# EAGLE board GB202-CC-from-SF-Base (EAGLE 7.5.0)

Size 100 x 80 mm. Coordinates in mm from the lower left corner, seen from the top.
Outline: 0,0 100,0 100,80 0,80 0,0
Copper layers (1*16): Top 0.035mm / dielectric 1.5mm / Bottom 0.035mm
Design rules "SparkFun-2-layer-STANDARD": minimum track width 10mil, minimum drill 20mil, track to track 10mil, track to pad 8mil, pad to pad 8mil, via to via 10mil, smd to smd 8mil, copper to edge 8mil, drill to drill 8mil, minimum pad ring 10mil, minimum via ring 10mil, stop-mask expansion 4mil, vias tented up to drill 20mil, thermal gap 10mil

## Footprints (pad centres in the part's own frame; a part is rotated, then mirrored left to right if it is on the bottom)
0603-CAP = smd 1.1 x 1: 1 -0.85,0; 2 0.85,0
EIA3216 = smd 1.4 x 1.6: A 1.4,0; C -1.4,0
C0603 = smd 1.1 x 1: 1 -0.85,0; 2 0.85,0
CAP-PTH-SMALL = drill 0.7 pad 1.651: 1 0,0; 2 2.54,0
SMA-DIODE = smd 1.27 x 1.47: A -2.15,0; C 2.15,0
PTC-1206 = smd 1 x 1.8: 1 -1.4,0; 2 1.4,0
DIL16 = drill 0.813 pad 1.6: 1 -8.89,-3.81 | drill 0.813 pad 1.6 octagon: 2 -6.35,-3.81; 3 -3.81,-3.81; 4 -1.27,-3.81; 5 1.27,-3.81; 6 3.81,-3.81; 7 6.35,-3.81; 8 8.89,-3.81; 9 8.89,3.81; 10 6.35,3.81; 11 3.81,3.81; 12 1.27,3.81; 13 -1.27,3.81; 14 -3.81,3.81; 15 -6.35,3.81; 16 -8.89,3.81
1X01 = drill 1.016 pad 1.88: 1 0,0
MICRO-FIDUCIAL = smd 0.635 x 0.635: 1 0,0
STAND-OFF = hole 3.302: 0,0
JST-2-SMD = smd 1 x 4.6: 1 -1,-3.7; 2 1,-3.7 | smd 1.6 x 3.4: NC1 -3.4,1.5; NC2 3.4,1.5
0603 = smd 1.1 x 1: 1 -0.85,0; 2 0.85,0
1X04_NO_SILK = drill 1.016 pad 1.88 square: 1 0,0 | drill 1.016 pad 1.88: 2 2.54,0; 3 5.08,0; 4 7.62,0
LED-0603 = smd 0.8 x 0.8: A 0,-0.75; C 0,0.75
TO-92 = drill 0.813 pad 1.88: 1 -1.27,0; 2 0,1.905; 3 1.27,0
HC49/S = drill 0.813: 1 -2.413,0; 2 2.413,0
SOT23-3 = smd 0.8 x 0.9: 1 -0.95,-1; 2 0.95,-1; 3 0,1.1
1X03_NO_SILK = drill 1.016 pad 1.88: 1 0,0; 2 2.54,0; 3 5.08,0
0603-RES = smd 1.1 x 1: 1 -0.85,0; 2 0.85,0
PAD.03X.03 = smd 0.762 x 0.762: P$1 0,0
PIC24FXXX_TQFP64 = smd 0.22 x 1: 1 -3.75,-5.75; 2 -3.25,-5.75; 3 -2.75,-5.75; 4 -2.25,-5.75; 5 -1.75,-5.75; 6 -1.25,-5.75; 7 -0.75,-5.75; 8 -0.25,-5.75; 9 0.25,-5.75; 10 0.75,-5.75; 11 1.25,-5.75; 12 1.75,-5.75; 13 2.25,-5.75; 14 2.75,-5.75; 15 3.25,-5.75; 16 3.75,-5.75; 33 3.75,5.75; 34 3.25,5.75; 35 2.75,5.75; 36 2.25,5.75; 37 1.75,5.75; 38 1.25,5.75; 39 0.75,5.75; 40 0.25,5.75; 41 -0.25,5.75; 42 -0.75,5.75; 43 -1.25,5.75; 44 -1.75,5.75; 45 -2.25,5.75; 46 -2.75,5.75; 47 -3.25,5.75; 48 -3.75,5.75 | smd 1 x 0.22: 17 5.75,-3.75; 18 5.75,-3.25; 19 5.75,-2.75; 20 5.75,-2.25; 21 5.75,-1.75; 22 5.75,-1.25; 23 5.75,-0.75; 24 5.75,-0.25; 25 5.75,0.25; 26 5.75,0.75; 27 5.75,1.25; 28 5.75,1.75; 29 5.75,2.25; 30 5.75,2.75; 31 5.75,3.25; 32 5.75,3.75; 49 -5.75,3.75; 50 -5.75,3.25; 51 -5.75,2.75; 52 -5.75,2.25; 53 -5.75,1.75; 54 -5.75,1.25; 55 -5.75,0.75; 56 -5.75,0.25; 57 -5.75,-0.25; 58 -5.75,-0.75; 59 -5.75,-1.25; 60 -5.75,-1.75; 61 -5.75,-2.25; 62 -5.75,-2.75; 63 -5.75,-3.25; 64 -5.75,-3.75
MSOP8 = smd 0.4 x 1.1: 1 -0.975,-2.25; 2 -0.325,-2.25; 3 0.325,-2.25; 4 0.975,-2.25; 5 0.975,2.25; 6 0.325,2.25; 7 -0.325,2.25; 8 -0.975,2.25
USB-AB-MICRO-SMD_V03 = smd 1.4 x 0.4: D+1 2.7,0; D-1 2.7,0.65; GND1 2.7,-1.3; ID1 2.7,-0.65; VBUS1 2.7,1.3 | hole 0.85: 2.2,1.9; 2.2,-1.9
TSSOP16 = smd 0.4 x 1.6: 1 -2.225,-2.85; 2 -1.575,-2.85; 3 -0.925,-2.85; 4 -0.275,-2.85; 5 0.375,-2.85; 6 1.025,-2.85; 7 1.675,-2.85; 8 2.325,-2.85; 9 2.325,3.05; 10 1.675,3.05; 11 1.025,3.05; 12 0.375,3.05; 13 -0.275,3.05; 14 -0.925,3.05; 15 -1.575,3.05; 16 -2.225,3.05
RTRIM3362P = drill 0.6: 1 -2.54,-2.54; 2 0,0; 3 2.54,-2.54

## Placement (x,y rotation side)
C1  0.1uF  [0603-CAP]  60.96,17.78 270 top
C2  0.1uF  [0603-CAP]  55.88,26.67 0 top
C3  0.1uF  [0603-CAP]  64.77,17.78 90 top
C4  0.1uF  [0603-CAP]  73.66,26.67 180 top
C5  0.1uF  [0603-CAP]  77.47,20.32 270 top
C6  10uf  [EIA3216]  90.17,20.32 90 top
C7  10uF  [EIA3216]  64.77,36.83 270 top
C9  10uf  [EIA3216]  80.01,20.32 90 top
C11  [C0603]  30.48,74.93 270 top
C12  [C0603]  45.72,74.93 270 top
C13  .1uF  [C0603]  44.45,59.69 270 top
C14  .1uF  [C0603]  67.31,67.31 0 top
C15  .1  [CAP-PTH-SMALL]  82.55,55.88 0 top
C16  .1  [CAP-PTH-SMALL]  82.55,48.26 0 top
C17  .1  [CAP-PTH-SMALL]  82.55,52.07 0 top
C18  .1uF  [C0603]  49.53,74.93 90 top
D1  DIODE-SCHOTTKY_  [SMA-DIODE]  83.82,7.62 0 top
F1  PTCSMD  [PTC-1206]  78.74,7.62 0 top
IC1  [DIL16]  45.72,67.31 0 top
JP3  M01PTH  [1X01]  90.17,76.2 0 top
JP8  FIDUCIALUFIDUCIAL  [MICRO-FIDUCIAL]  5.08,46.99 0 top
JP10  STAND-OFF  [STAND-OFF]  3.81,3.81 0 top
JP11  STAND-OFF  [STAND-OFF]  96.52,3.81 0 top
JP12  STAND-OFF  [STAND-OFF]  96.52,76.2 0 top
JP13  STAND-OFF  [STAND-OFF]  3.81,76.2 0 top
JP16  FIDUCIALUFIDUCIAL  [MICRO-FIDUCIAL]  5.08,48.26 0 top
JP19  JST Connector  [JST-2-SMD]  96.52,13.97 270 top
L1  30Ohm,1.8A  [0603]  58.42,17.78 270 top
LCD  [1X04_NO_SILK]  97.79,55.88 180 top
LED1  LY L29K-J1K2-26-Z  [LED-0603]  78.74,30.48 90 top
LED2  LS L29K-G1J2-1-Z  [LED-0603]  83.82,20.32 180 top
Q1  [TO-92]  59.69,73.66 90 top
Q2  [TO-92]  67.31,73.66 90 top
Q3  4.4336Mhz  [HC49/S]  38.1,74.93 180 top
Q4  BSS138  [SOT23-3]  90.17,48.26 0 top
Q5  BSS138  [SOT23-3]  93.98,48.26 0 top
QTR1  [1X03_NO_SILK]  92.71,64.77 0 top
QTR2  [1X03_NO_SILK]  92.71,59.69 0 top
R1  10k  [0603-RES]  52.07,26.67 0 top
R2  1K  [0603-RES]  55.88,77.47 270 top
R3  1K  [0603-RES]  63.5,77.47 270 top
R4  10K  [0603-RES]  90.17,44.45 0 top
R5  10K  [0603-RES]  88.9,52.07 0 top
R6  10K  [0603-RES]  93.98,44.45 0 top
R7  750  [0603-RES]  80.01,26.67 270 top
R8  470  [0603-RES]  52.07,29.21 180 top
R9  1.6k  [0603-RES]  86.36,20.32 270 top
R10  10K  [0603-RES]  93.98,52.07 180 top
R11  DNP  [0603-RES]  92.71,27.94 180 top
RADIO  [1X04_NO_SILK]  97.79,71.12 180 top
TP5  TEST-POINT3  [PAD.03X.03]  43.18,72.39 0 top
TP6  TEST-POINT3  [PAD.03X.03]  54.61,62.23 0 top
TP7  TEST-POINT3  [PAD.03X.03]  5.08,44.45 0 top
TP8  TEST-POINT3  [PAD.03X.03]  5.08,41.91 0 top
U1  PIC24FJ256GB206  [PIC24FXXX_TQFP64]  64.77,26.67 270 top
U2  VREG_MIC5216  [MSOP8]  85.09,13.97 0 top
U3  VREG_MIC5216  [MSOP8]  80.01,13.97 0 top
U4  [USB-AB-MICRO-SMD_V03]  99.06,25.4 180 top
U5  MAX232TSSOP  [TSSOP16]  83.82,62.23 0 top
U$3  RTRIM-3362P  [RTRIM3362P]  52.07,59.69 0 top
U$13  RTRIM-3362P  [RTRIM3362P]  60.96,59.69 0 top
U$14  RTRIM-3362P  [RTRIM3362P]  63.5,67.31 270 top

## Library data of the parts
C1-C6 C9 C15-C17 = SparkFun-Capacitors
C7 JP3 JP8 JP10-JP13 JP16 JP19 LED2 Q4 Q5 R4-R6 R10 R11 = SparkFun
C11-C14 C18 = rcl
D1 = SparkFun-DiscreteSemi
F1 U2 U3 = SparkFun-PowerIC
IC1 = tcm3105
L1 TP5-TP8 = SparkFun-Passives
LCD RADIO = SparkFun-Connectors; PROD_ID: CONN-09696
LED1 = SparkFun-LED
Q1 Q2 = SparkFun-DiscreteSemi; PROD_ID: TRANS-08447
Q3 = crystal; OC_FARNELL: 1667008; OC_NEWARK: unknown
QTR1 QTR2 = SparkFun-Connectors
R1-R3 R7-R9 = SparkFun-Resistors
U1 U5 = SparkFun-DigitalIC
U4 = Testing
U$3 U$13 U$14 = GeekAmmo

## Nets
3.3V: C2.1 C3.1 C4.1 C5.1 C9.A L1.2 Q4.1 Q5.1 R1.2 R4.1 R6.1 R7.2 U1.10 U1.26 U1.35 U1.38 U1.57 U3.3 U5.16
5V: C6.A D1.C IC1.1 LCD.2 R5.1 R9.2 R10.1 U2.3 U3.1 U3.2
+5.0: U$3.3 U$13.3
BOOT: LED1.C U1.39
D+: U1.37 U4.D+1
D-: U1.36 U4.D-1
GND: C1.2 C2.2 C3.2 C4.2 C5.2 C6.C C7.C C9.C C11.2 C12.2 IC1.5 IC1.9 IC1.12 IC1.13 JP3.1 JP19.1 LCD.1 LED2.C Q1.1 Q2.1 QTR1.3 QTR2.3 R11.1 RADIO.2 U1.9 U1.20 U1.25 U1.41 U2.5 U2.6 U2.7 U2.8 U3.5 U3.6 U3.7 U3.8 U4.GND1 U5.15 U$3.1 U$13.1 U$14.1
HOST: U1.40
HV-SCL: LCD.3 Q5.3 R10.2
HV-SDA: LCD.4 Q4.3 R5.2
LV-SCL: Q5.2 R6.2
LV-SDA: Q4.2 R4.2
MCLR: R8.1 U1.7
N$1: Q1.2 R2.2
N$2: LED1.A R7.1
N$3: LED2.A R9.1
N$4: D1.A F1.2
N$5: C7.A U1.56
N$6: Q2.2 R3.2
N$9: C1.1 L1.1 U1.19
N$10: C11.1 IC1.16 Q3.2
N$11: C12.1 IC1.15 Q3.1
N$12: C13.1 IC1.4
N$13: C14.1 U$14.2
N$17: IC1.10 U$13.2
N$18: IC1.7 U$3.2
N$19: C18.1 IC1.11
N$20: C18.2 U$14.3
N$23: C15.1 U5.1
N$25: C15.2 U5.3
N$26: C16.1 U5.4
N$27: C16.2 U5.5
N$28: C17.2 U5.6
N$29: C17.1 U5.2
P7: R1.1 R8.2
PIN1: U1.31
PIN2: U1.32
PIN3: U1.42
PIN4: U1.43
PIN5: U1.44
PIN6: U1.45
PIN7: U1.46
PIN8: U1.47
PIN9: U1.48
PIN10: U1.49
PIN11: U1.50
PIN12: U1.51
PIN13: U1.52
PIN14: U1.53
PIN15: U1.54
PIN16: U1.55
PIN17: U1.58
PIN18: U1.59
PIN19: U1.60
PIN20: U1.61
PIN21: U1.62
PIN22: U1.63
PIN23: U1.64
PIN24: U1.1
PIN25: U1.2
PIN26: U1.3
PIN27: U1.4
PIN28: U1.5
PIN29: U1.6
PIN30: U1.8
PIN31: U1.11
PIN32: U1.12
PIN33: U1.13
PIN34: U1.14
PIN35: U1.15
PIN36: U1.16
PIN37: U1.17
PIN38: U1.18
PIN39: U1.21
PIN40: U1.22
PIN41: U1.23
PIN42: U1.24
PIN43: U1.27
PIN44: U1.28
PIN45: U1.29
PIN46: U1.30
PTT_OUT: R2.1
QTR1-RX: QTR1.2 U5.13
QTR1-RXD: U5.12
QTR1-TX: QTR1.1 U5.14
QTR1-TXD: U5.11
QTR2-RX: QTR2.2 U5.8
QTR2-RXD: U5.9
QTR2-TX: QTR2.1 U5.7
QTR2-TXD: U5.10
RAD-PT: Q1.3
RAD-RX: C13.2 RADIO.1
RAD-TX: Q2.3 RADIO.3
RAD_PT: RADIO.4
RX-A: TP8.P$1
TCM-RXD: IC1.8 TP6.P$1
TCM-TXD: IC1.14 TP5.P$1
TX-A: TP7.P$1
TX_MUTE: R3.1
USBID: R11.2 U1.33 U4.ID1
VBUS: F1.1 U1.34 U4.VBUS1
VIN: JP19.2 U2.1 U2.2

## Tracks (layer width: path | path; a pad name or v marks a point on that pad's centre or on a via)
3.3V  (18 unrouted)
5V  (9 unrouted)
+5.0  (1 unrouted)
BOOT  (1 unrouted)
D+  (1 unrouted)
D-  (1 unrouted)
GND  (40 unrouted)
HV-SCL  (2 unrouted)
HV-SDA  (2 unrouted)
LV-SCL  (1 unrouted)
LV-SDA  (1 unrouted)
MCLR  (1 unrouted)
N$1  (1 unrouted)
N$2  (1 unrouted)
N$3  (1 unrouted)
N$4  (1 unrouted)
N$5  (1 unrouted)
N$6  (1 unrouted)
N$9  (2 unrouted)
N$10  (2 unrouted)
N$11  (2 unrouted)
N$12  (1 unrouted)
N$13  (1 unrouted)
N$17  (1 unrouted)
N$18  (1 unrouted)
N$19  (1 unrouted)
N$20  (1 unrouted)
N$23  (1 unrouted)
N$25  (1 unrouted)
N$26  (1 unrouted)
N$27  (1 unrouted)
N$28  (1 unrouted)
N$29  (1 unrouted)
P7  (1 unrouted)
QTR1-RX  (1 unrouted)
QTR1-TX  (1 unrouted)
QTR2-RX  (1 unrouted)
QTR2-TX  (1 unrouted)
RAD-RX  (1 unrouted)
RAD-TX  (1 unrouted)
TCM-RXD  (1 unrouted)
TCM-TXD  (1 unrouted)
USBID  (2 unrouted)
VBUS  (2 unrouted)
VIN  (2 unrouted)